# Allegro board CN0536 Allegro File.brd
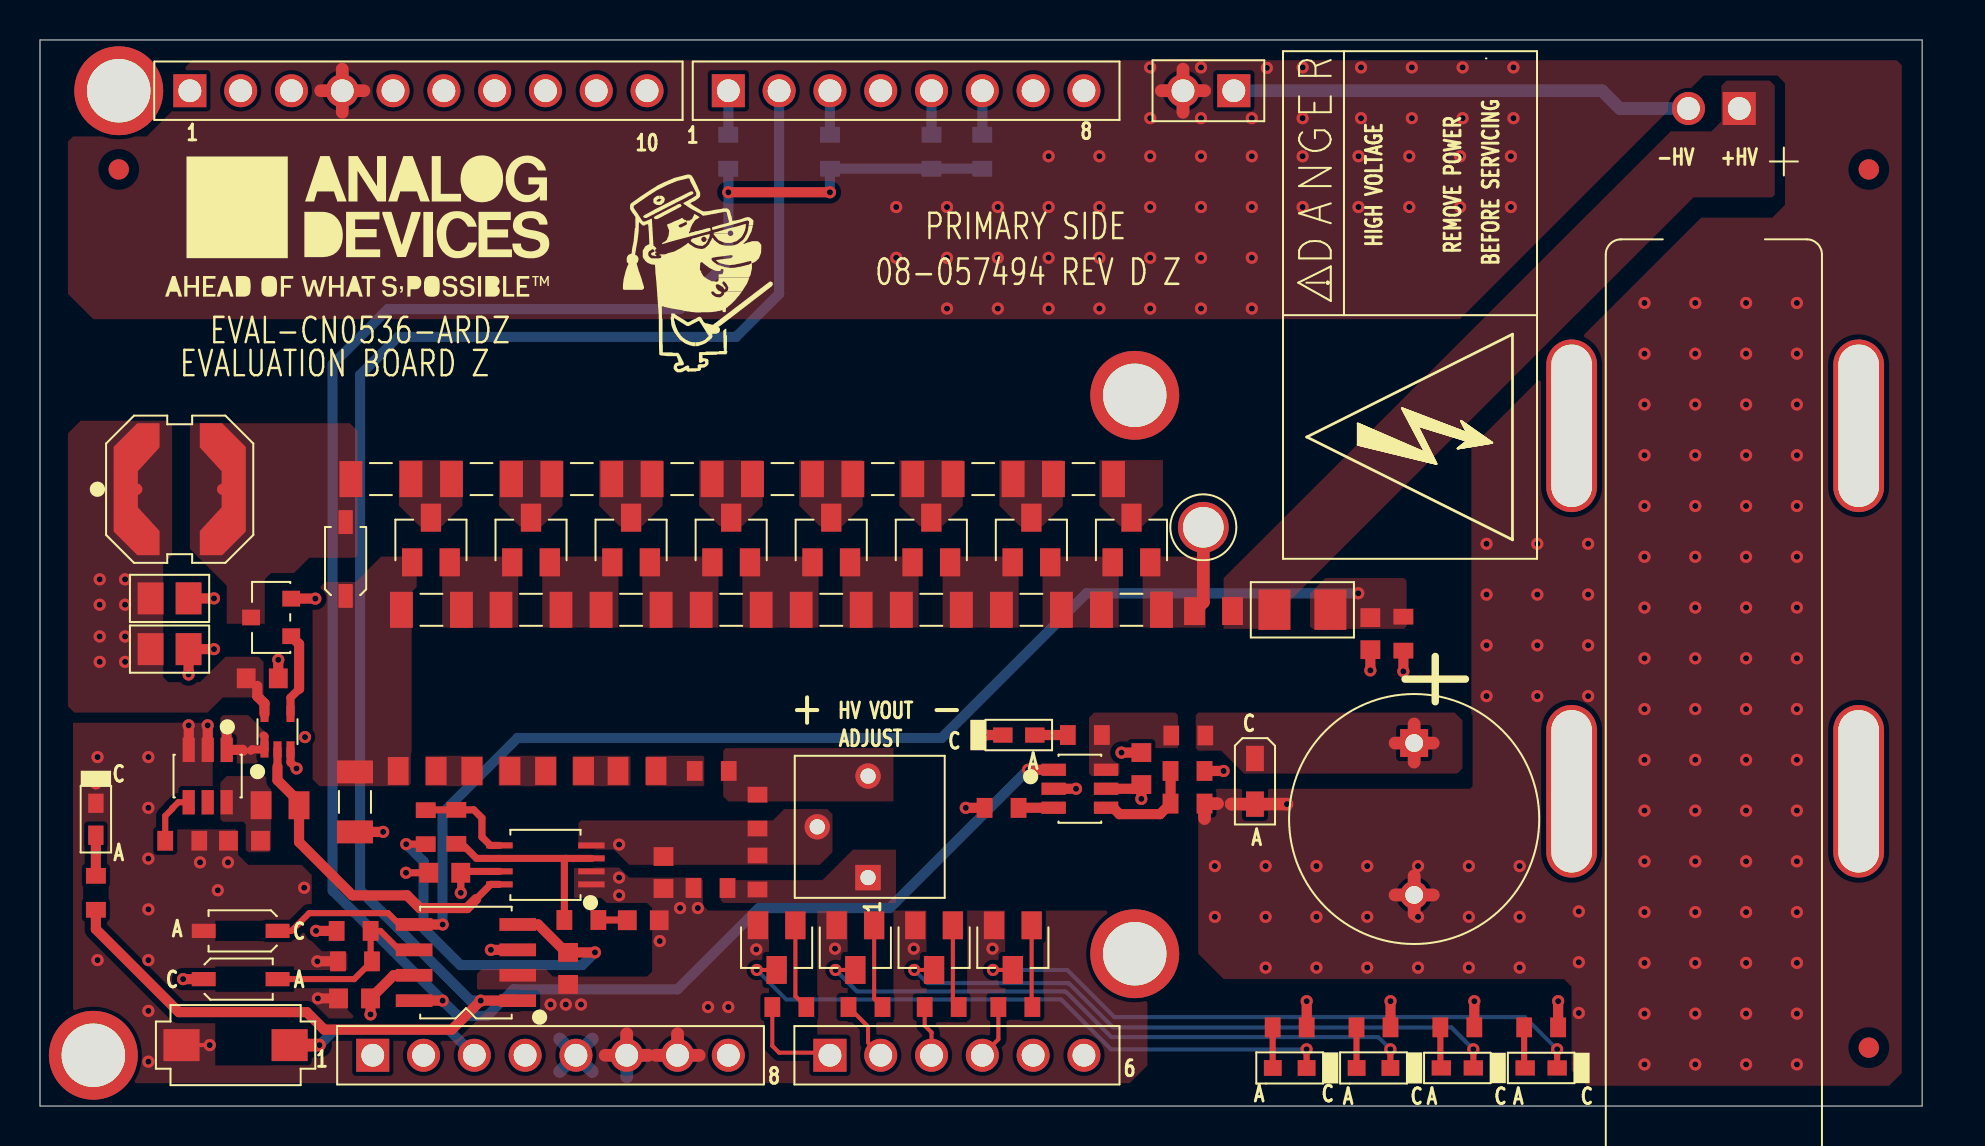
[diagram p0: board, top side]
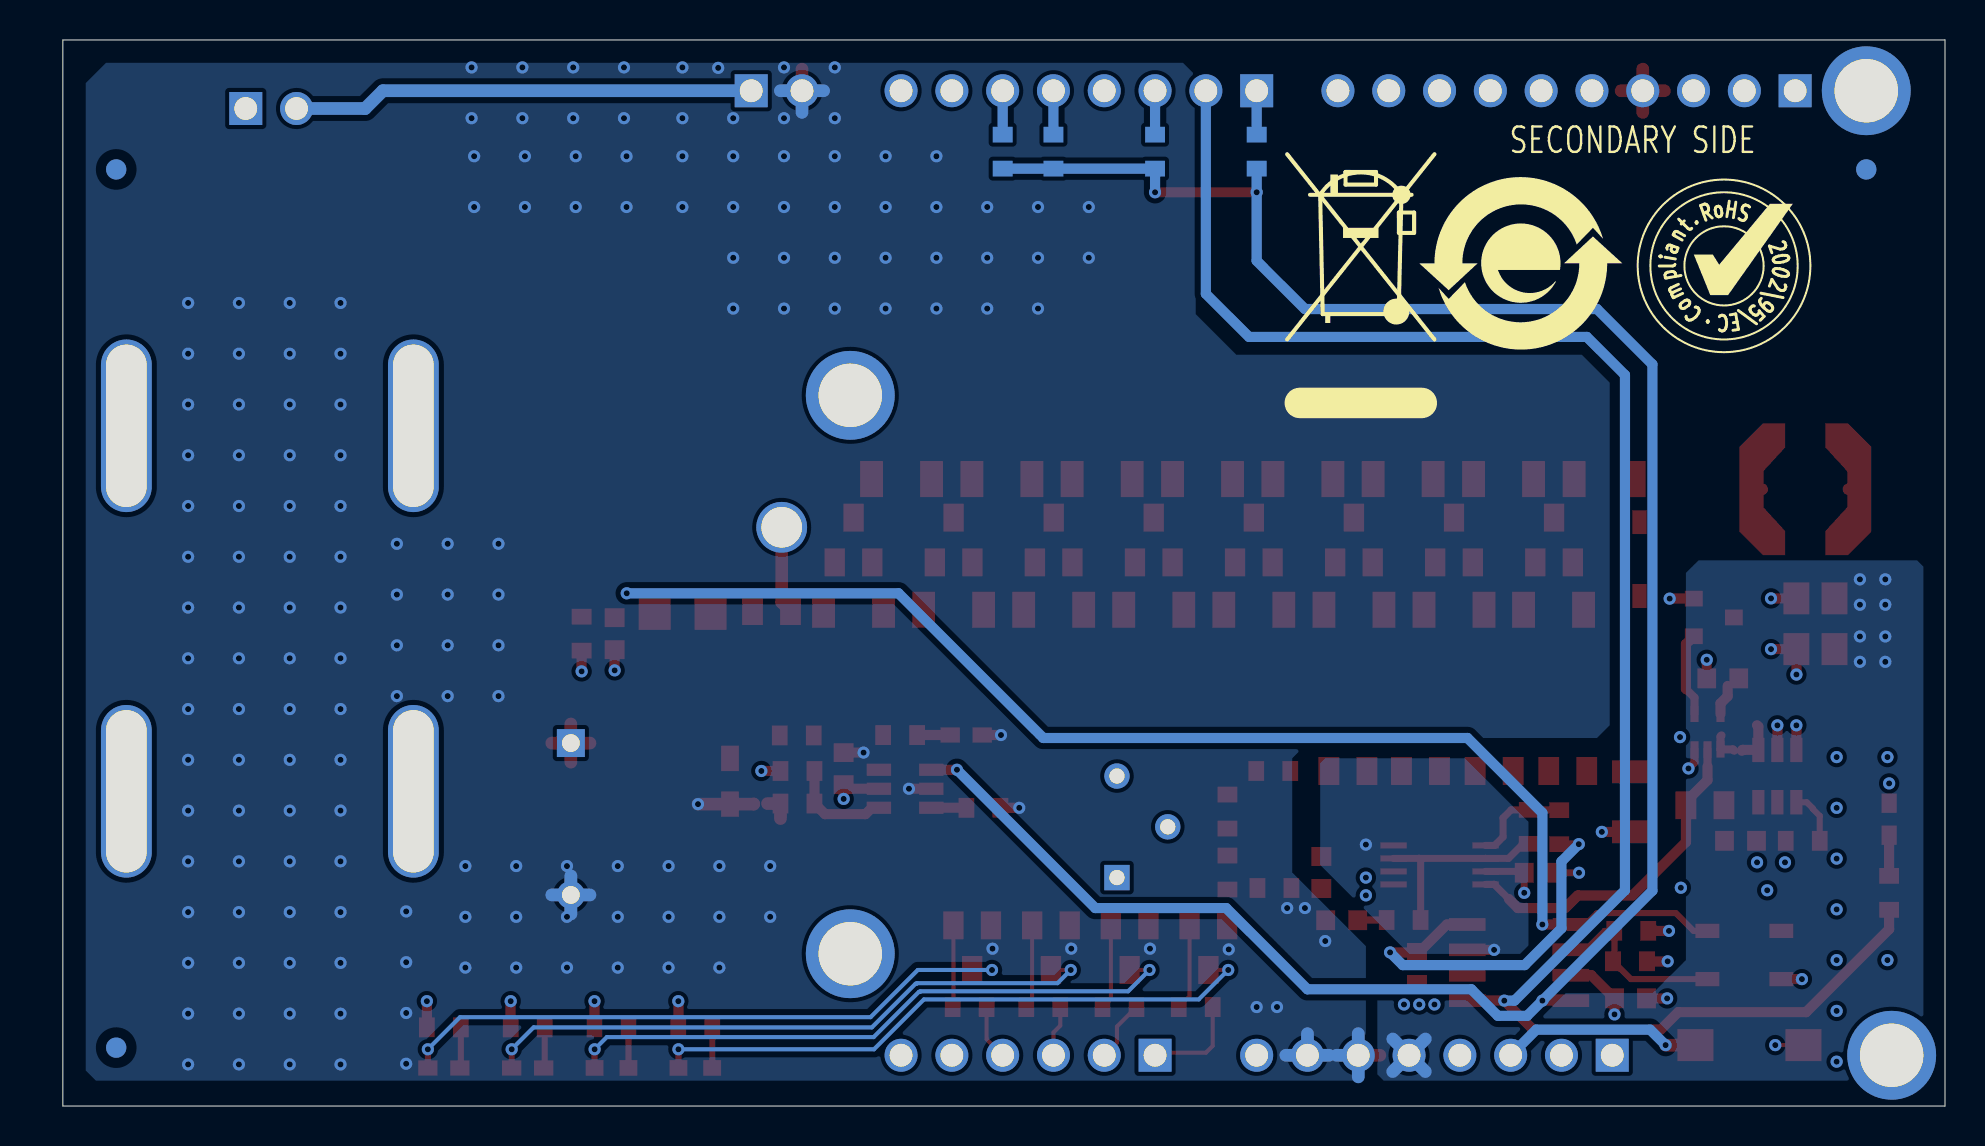
[diagram p1: board, bottom side, seen from below]

Outline 94.11 x 53.34 mm; copper layers: TOP, L2_GND, L3_VCC, BOTTOM. Coordinates in mm from the lower left corner of the outline.
Outline path: 0,53.34 0,0 94.11,0 94.11,53.34 0,53.34

## Design rules (mm)
constraint set DEFAULT: min track width 0.203

## Placement (name value [footprint] x y rotation side)
C1  1uF  [C0603]  10.22 13.27 180 top
C2  10uF  [C0805H53]  6.48 22.86 0 top
C3  10uF  [C0805H53]  6.48 25.4 0 top
C4  1uF  [C0603]  11.11 21.4 0 top
C5  0.1uF  [C1206]  15.75 15.22 270 top
C6  0.1uF  [C1206]  17.04 31.37 0 top
C7  0.1uF  [C1206]  19.57 24.83 0 top
C8  0.1uF  [C1206]  22.07 31.37 0 top
C9  47pF  [C0603]  31.18 11.68 90 top
C10  0.1uF  [C1206]  24.55 24.83 0 top
C11  0.1uF  [C1206]  27.09 31.37 0 top
C12  0.1uF  [C1206]  29.55 24.83 0 top
C13  47pF  [C0603]  26.4 6.89 270 top
C14  0.1uF  [C1206]  32.11 31.37 0 top
C15  0.1uF  [C1206]  34.56 24.83 0 top
C16  0.1uF  [C1206]  37.12 31.37 0 top
C17  0.1uF  [C1206]  39.56 24.83 0 top
C18  1uF  [C0603]  30.16 9.3 0 top
C19  0.1uF  [C1206]  42.14 31.37 0 top
C20  1uF  [C0603]  20.24 11.67 180 top
C21  0.1uF  [C1206]  44.57 24.83 0 top
C22  1uF  [C0603]  15.73 5.39 180 top
C23  0.1uF  [C1206]  47.16 31.37 0 top
C24  0.1uF  [C1206]  49.57 24.83 0 top
C25  0.1uF  [C1206]  52.17 31.37 0 top
C26  10pF  [C1206H37]  63.12 24.83 180 top
C27  0.1uF  [C1206]  54.57 24.83 0 top
C28  250pF  [C0603]  66.52 23.63 270 top
C29  1uF  [C0603]  55.07 16.88 90 top
D1  BAV21W-7-F  [SOD123-3]  15.28 27.37 90 top
D2  BAV23S  [SOT23]  19.55 28.32 0 top
D3  BAV23S  [SOT23]  24.55 28.32 0 top
D4  BAV23S  [SOT23]  29.55 28.32 0 top
D5  BAV23S  [SOT23]  34.56 28.32 0 top
D6  BAV23S  [SOT23]  39.56 28.32 0 top
D7  BAV23S  [SOT23]  44.57 28.32 0 top
D8  BAV23S  [SOT23]  49.57 28.32 0 top
D9  BAV23S  [SOT23]  54.57 28.32 0 top
D10  BAS16HT1G  [SOD323]  60.75 16.25 270 top
D11  BAV21W-7-F  [SOD123-3]  10.03 6.35 0 top
D12  BAV21W-7-F  [SOD123-3]  10.03 8.76 180 top
DS1  TLMS1000GS08  [LED0603]  48.94 18.56 0 top
DS2  19-217/S2C-AL1M2VY/3T  [LED0603_A]  62.48 1.91 180 top
DS3  19-217/S2C-AL1M2VY/3T  [LED0603_A]  66.67 1.91 180 top
DS4  TLMS1000GS08  [LED0603]  70.87 1.91 180 top
DS5  TLMS1000GS08  [LED0603]  75.06 1.91 180 top
DS6  TLMS1000GS08  [LED0603]  2.79 14.35 270 top
JP1  0  [R0603]  39.5 47.75 270 bottom
JP2  0  [R0603]  34.42 47.75 270 bottom
JP3  0  [R0603]  44.58 47.75 270 bottom
JP4  0  [R0603]  47.12 47.75 270 bottom
L1  47uH  [LSMSQ236H138]  6.98 30.86 0 top
M1  AI-1223-TWT-5V-5-R  [TORAD299D472H382]  68.71 18.16 270 top
M2  SI-29BG  [MSI-29BG]  84.96 49.91 270 top
NOREF  -  []  -22.71 -2.15 0 top
NOREF#2  -  []  -90.8 -138.3 0 top
NOREF#3  -  []  218.31 74.8 0 top
NOREF#4  -  []  2.67 2.54 0 top
NOREF#5  -  []  86.65 56.15 0 top
NOREF#6  -  [unnamed#2]  3.94 50.8 0 top
NOREF#7  -  []  -90.8 -138.3 0 top
NOREF#8  -  [unnamed#3]  90.93 34.04 90 top
NOREF#9  -  []  10.21 2.54 0 top
NOREF#10  -  [unnamed#3]  76.58 34.04 90 top
NOREF#11  -  [unnamed#4]  91.44 46.86 0 top
NOREF#12  -  []  66.8 -32.26 0 top
NOREF#13  -  []  94.11 0 0 top
NOREF#14  -  []  -90.8 -138.3 0 top
NOREF#15  -  []  -90.8 -138.3 0 top
NOREF#16  -  []  -48.13 2.86 0 top
NOREF#17  -  []  17.02 43.81 0 top
NOREF#18  -  [unnamed#4]  3.94 46.86 0 top
NOREF#19  -  []  26.8 243.84 0 top
NOREF#20  -  [unnamed#2]  54.74 35.56 0 top
NOREF#21  -  []  221.59 85.09 0 top
NOREF#22  -  [unnamed#3]  76.58 15.75 90 top
NOREF#23  -  []  0 0 0 top
NOREF#24  -  []  -86.11 -38.73 0 top
NOREF#25  -  [unnamed#3]  90.93 15.75 90 top
NOREF#26  -  []  259.71 331.53 0 top
NOREF#27  -  [unnamed#4]  91.44 2.92 0 top
NOREF#28  -  []  94.11 0 90 top
NOREF#29  -  []  2.67 2.54 0 top
NOREF#30  -  []  0 53.34 0 top
NOREF#31  -  []  0 0 0 top
NOREF#32  -  [unnamed#2]  54.74 7.62 0 top
NOREF#33  -  []  32.89 41.66 0 top
NOREF#34  -  [unnamed#2]  2.67 2.54 0 top
NOREF#35  -  []  -52.7 188.09 0 top
NOREF#36  -  []  0 53.34 0 top
NOREF#37  -  []  21.21 42.16 180 bottom
NOREF#38  -  []  19.94 51.31 180 bottom
NOREF#39  -  []  11.05 42.04 180 bottom
NOREF#40  -  [unnamed#4]  91.44 2.92 180 bottom
NOREF#41  -  [unnamed#4]  91.44 46.86 180 bottom
NOREF#42  -  [unnamed#4]  3.94 46.86 180 bottom
P1  SSQ-108-03-G-S  [CNSAMTECSSQ-108-XX-X-S]  16.64 2.54 0 top
P2  SSQ-106-03-G-S  [CNSAMTECSSQ-106-XX-X-S]  39.5 2.54 0 top
P3  SSQ-110-03-G-S  [CNSAMTECSSQ-110-XX-X-S]  7.49 50.8 0 top
P4  SSQ-108-03-G-S  [CNSAMTECSSQ-108-XX-X-S]  34.42 50.8 0 top
P5  TSW-102-08-G-S  [CNSAMTEC1X2H330LD36]  58.42 50.8 180 top
Q1  MMBT3904LT3G  [SOT23]  40.77 7.92 180 top
Q2  DMN10H220L-7  [SOT23-M3]  11.56 24.45 90 top
Q3  MMBT3904LT3G  [SOT23]  36.83 7.92 180 top
Q4  MMBT3904LT3G  [SOT23]  44.7 7.92 180 top
Q5  MMBT3904LT3G  [SOT23]  48.64 7.92 180 top
R1  287K  [R0603]  7.11 13.27 0 top
R2  221  [R0805]  12 15.05 0 top
R3  30MEG  [R0805]  18.86 16.76 180 top
R4  30MEG  [R0805]  22.55 16.76 180 top
R5  30MEG  [R0805]  26.23 16.76 180 top
R6  127K  [R0603]  48.08 14.92 180 top
R7  3MEG  [R0603]  33.59 16.76 0 top
R8  2.7MEG  [R0603]  33.53 10.91 0 top
R9  2MEG  [POTBOURNS3262P]  41.4 11.43 90 top
R10  1MEG  [R0603]  35.88 14.73 90 top
R11  1MEG  [R0603]  35.88 11.68 90 top
R12  127K  [R0603]  20.82 13.97 90 top
R13  453K  [R0603]  19.29 13.95 270 top
R14  453K  [R0603]  57.38 15.13 0 top
R15  127K  [R0603]  57.38 16.76 180 top
R16  1K  [R0603]  27.07 9.31 0 top
R17  330  [R0603]  2.79 10.67 90 top
R18  100  [R0603]  57.41 18.54 0 top
R19  30MEG  [R0805]  58.67 24.77 180 top
R20  30MEG  [R0805]  29.85 16.76 180 top
R21  24.9K  [R0603]  68.17 23.63 270 top
R22  330  [R0603]  52.24 18.56 180 top
R23  330  [R0603]  62.48 3.94 180 top
R24  330  [R0603]  66.67 3.94 180 top
R25  330  [R0603]  70.87 3.94 180 top
R26  330  [R0603]  75.06 3.94 180 top
R27  3MEG  [R0603]  15.68 8.76 0 top
R28  2MEG  [R0603]  15.75 7.24 180 top
R29  3.3K  [R0603]  37.47 4.95 0 top
R30  3.3K  [R0603]  41.27 4.95 0 top
R31  3.3K  [R0603]  45.09 4.95 0 top
R32  3.3K  [R0603]  48.77 4.95 0 top
S1  SKQMBBE010  [SWSML236W138H197]  9.78 3.05 180 top
TP1  TESTPAD  [TPC100D80]  58.17 28.96 0 top
U1  SN74LVC1G08DCKR  [SC70-5]  11.87 18.73 0 top
U2  LTC1540IMS8#PBF  [MSOP8]  25.27 12.07 90 top
U3  LTC6906IS6#PBF  [TSOT23_6]  8.38 16.51 180 top
U4  LTC6994CS6-1#TRMPBF  [TSOT23_6]  51.99 15.88 270 top
U5  LTC1441CS8#PBF  [SO8NB-5]  21.3 7.18 90 top

## Library data of the parts
C1 C4 C18 C20 C22 C29 = CAP: User Part Number: UPN; Tolerance: 10; alternate symbols: (); part number: CAP_SM-1UF,16V,10,E020111,C0603; tolerance: 10
C2 C3 = CAP: Tolerance: 10; User Part Number: UPN; alternate symbols: (); part number: CAP_SM-10UF,16V,10,E006166,C0805H53; tolerance: 10
C5-C8 C10-C12 C14-C17 C19 C21 C23-C25 C27 = CAP: User Part Number: UPN; Tolerance: 5; alternate symbols: (); part number: CAP_SM-0.1UF,100V,5,E019934,C1206; tolerance: 5
C9 C13 = CAP: User Part Number: UPN; Tolerance: 10; alternate symbols: (); part number: CAP_SM-47PF,50V,10,E040135,C0603; tolerance: 10
C26 = CAP: Tolerance: 5; User Part Number: UPN; alternate symbols: (); part number: CAP_SM-10PF,630V,5,E041857,C1206H37; tolerance: 5
C28 = CAP: User Part Number: UPN; Tolerance: 5; alternate symbols: (); part number: CAP_SM-250PF,25V,5,E040628,C0603; tolerance: 5
D1 D11 D12 = DIO: Tolerance: N/A; User Part Number: UPN; alternate symbols: (); part number: DIO_SM-BAV21W-7-F,200V,N/A,E015087,SOD123-3; tolerance: N/A
D2-D9 = DIO3P_V3: User Part Number: UPN; Tolerance: N/A; alternate symbols: (); part number: DIO3P_V3_SM-BAV23S,250V,N/A,E034937,SOT23; tolerance: N/A
D10 = DIO: Tolerance: N/A; User Part Number: UPN; alternate symbols: (); part number: DIO_SM-BAS16HT1G,100V,N/A,E001129,SOD323; tolerance: N/A
DS1 DS4-DS6 = DIOLED: Tolerance: N/A; User Part Number: UPN; alternate symbols: (); part number: DIOLED_SM-TLMS1000GS08,N/A,N/A,E018253,LED0603; tolerance: N/A
DS2 DS3 = DIOLED: User Part Number: UPN; Tolerance: N/A; alternate symbols: (); part number: DIOLED_SM-19-217/S2C-AL1M2VY/3T,5V,N/A,E026542,LED0603_A; tolerance: N/A
JP1-JP4 = RESJMPRSHRT: User Part Number: UPN; Tolerance: JUMPER; alternate symbols: (); part number: RESJMPRSHRT_SM-0,E004447,1/10W,JUMPER,R0603; tolerance: JUMPER
L1 = IND: User Part Number: UPN; Tolerance: 20; alternate symbols: (); part number: IND_SM-47UH,20,E018439,LSMSQ236H138; tolerance: 20
M1 = ICAI_1223: User Part Number: UPN; Tolerance: N/A; alternate symbols: (); part number: ICAI_1223_TH-AI-1223-TWT-5V-5-R,E030982,TORAD299D472H382; tolerance: N/A
M2 = MOD_SI_29BG: User Part Number: UPN; Tolerance: N/A; alternate symbols: (); part number: MOD_SI_29BG_TH-SI-29BG,E039719,MSI-29BG; tolerance: N/A
P1 P4 = CN8P_A: User Part Number: UPN; Tolerance: N/A; alternate symbols: (); part number: CN8P_A_TH-SSQ-108-03-G-S,E020478,CNSAMTECSSQ-108-XX-X-S; tolerance: N/A
P2 = CN6P: User Part Number: UPN; Tolerance: N/A; alternate symbols: (); part number: CN6P_TH-SSQ-106-03-G-S,E020477,CNSAMTECSSQ-106-XX-X-S; tolerance: N/A
P3 = CN10P: User Part Number: UPN; Tolerance: N/A; alternate symbols: (); part number: CN10P_TH-SSQ-110-03-G-S,E020479,CNSAMTECSSQ-110-XX-X-S; tolerance: N/A
P5 = CN2P: User Part Number: UPN; Tolerance: N/A; alternate symbols: (); part number: CN2P_TH-TSW-102-08-G-S,E006296,CNSAMTEC1X2H330LD36; tolerance: N/A
Q1 Q3-Q5 = TRANNPN_V2: User Part Number: UPN; Tolerance: N/A; alternate symbols: (); part number: TRANNPN_V2_SM-MMBT3904LT3G,E025627,SOT23; tolerance: N/A
Q2 = TRANNMOSFET_V8: User Part Number: UPN; Tolerance: N/A; alternate symbols: (); part number: TRANNMOSFET_V8_SM-DMN10H220L-7,E042109,SOT23-M3; tolerance: N/A
R1 = RES: User Part Number: UPN; Tolerance: 1; alternate symbols: (R0603L); part number: RES_SM-287K,E026586,1/10W,1,R0603; tolerance: 1
R2 = RES: User Part Number: UPN; Tolerance: 0.1; alternate symbols: (R0805L); part number: RES_SM-221,E004167,1/10W,0.1,R0805; tolerance: 0.1
R3-R5 R19 R20 = RES: User Part Number: UPN; Tolerance: 1; alternate symbols: (); part number: RES_SM-30MEG,E034828,1/5W,1,R0805; tolerance: 1
R6 R12 R15 = RES: User Part Number: UPN; Tolerance: 1; alternate symbols: (R0603L); part number: RES_SM-127K,E025582,1/16W,1,R0603; tolerance: 1
R7 R27 = RES: User Part Number: UPN; Tolerance: 1; alternate symbols: (R0603L); part number: RES_SM-3MEG,E011856,1/10W,1,R0603; tolerance: 1
R8 = RES: User Part Number: UPN; Tolerance: 5; alternate symbols: (); part number: RES_SM-2.7MEG,E043637,1/10W,5,R0603; tolerance: 5
R9 = RESVAR: Tolerance: 10; User Part Number: UPN; alternate symbols: (); part number: RESVAR_TH-2MEG,E038798,1/2W,10,POTBOURNS3262P; tolerance: 10
R10 R11 = RES: User Part Number: UPN; Tolerance: 1; alternate symbols: (R0603L); part number: RES_SM-1MEG,E003682,1/10W,1,R0603; tolerance: 1
R13 R14 = RES: User Part Number: UPN; Tolerance: 1; alternate symbols: (); part number: RES_SM-453K,E032192,1/10W,1,R0603; tolerance: 1
R16 = RES: User Part Number: UPN; Tolerance: 1; alternate symbols: (R0603L); part number: RES_SM-1K,E029591,1/10W,1,R0603; tolerance: 1
R17 R22-R26 = RES: User Part Number: UPN; Tolerance: 5; alternate symbols: (R0603L); part number: RES_SM-330,E003857,1/10W,5,R0603; tolerance: 5
R18 = RES: User Part Number: UPN; Tolerance: 1; alternate symbols: (R0603L); part number: RES_SM-100,E003668,1/10W,1,R0603; tolerance: 1
R21 = RES: User Part Number: UPN; Tolerance: 1; alternate symbols: (R0603L); part number: RES_SM-24.9K,E025629,1/10W,1,R0603; tolerance: 1
R28 = RES: User Part Number: UPN; Tolerance: 1; alternate symbols: (R0603L); part number: RES_SM-2MEG,E021609,1/10W,1,R0603; tolerance: 1
R29-R32 = RES: User Part Number: UPN; Tolerance: 5; alternate symbols: (R0603L); part number: RES_SM-3.3K,E036086,1/4W,5,R0603; tolerance: 5
S1 = SWSPST2PIN_V3: Tolerance: N/A; User Part Number: UPN; alternate symbols: (); part number: SWSPST2PIN_V3_SM-SKQMBBE010,E026439,SWSML236W138H197; tolerance: N/A
TP1 = NCTESTPAD: Tolerance: N/A; User Part Number: UPN; alternate symbols: (); part number: NCTESTPAD_TH-TESTPAD,E019699,TPC100D80; tolerance: N/A
U1 = 741G08: Tolerance: N/A; User Part Number: UPN; alternate symbols: (); part number: 741G08_SM-SN74LVC1G08DCKR,E019772,SC70-5; tolerance: N/A
U2 = ADLTC1540: Tolerance: N/A; User Part Number: UPN; alternate symbols: (); part number: ADLTC1540_SM-LTC1540IMS8#PBF,E043510,MSOP8; tolerance: N/A
U3 = ADLTC6906: User Part Number: UPN; Tolerance: N/A; alternate symbols: (); part number: ADLTC6906_SM-LTC6906IS6#PBF,E038452,TSOT23_6; tolerance: N/A
U4 = ADLTC6994: User Part Number: UPN; Tolerance: N/A; alternate symbols: (); part number: ADLTC6994_SM-LTC6994CS6-1#TRMPBF,E038792,TSOT23_6; tolerance: N/A
U5 = ADLTC1441: Tolerance: N/A; User Part Number: UPN; alternate symbols: (); part number: ADLTC1441_SM-LTC1441CS8#PBF,E038786,SO8NB-5; tolerance: N/A

## Footprints (pads in the part's own frame, mm; a bottom-side part is the same pattern mirrored in y, then rotated)
C0603
  rect 0.94x0.991 smd: 1(-0.8,0) 2(0.8,0)
C0805H53
  rect 1.295x1.6 smd: 1(-0.953,0) 2(0.953,0)
C1206
  rect 1.143x1.803 smd: 1(-1.5,0) 2(1.5,0)
C1206H37
  rect 1.6x2.007 smd: 1(-1.397,0) 2(1.397,0)
CNSAMTEC1X2H330LD36
  rect 1.651x1.651 hole 1.143: 1(-1.27,0)
  round 1.651 hole 1.143: 2(1.27,0)
CNSAMTECSSQ-106-XX-X-S
  rect 1.651x1.651 hole 1.143: 1(0,0)
  round 1.651 hole 1.143: 2(2.54,0) 3(5.08,0) 4(7.62,0) 5(10.16,0) 6(12.7,0)
CNSAMTECSSQ-108-XX-X-S
  rect 1.651x1.651 hole 1.143: 1(0,0)
  round 1.651 hole 1.143: 2(2.54,0) 3(5.08,0) 4(7.62,0) 5(10.16,0) 6(12.7,0) 7(15.24,0) 8(17.78,0)
CNSAMTECSSQ-110-XX-X-S
  rect 1.651x1.651 hole 1.143: 1(0,0)
  round 1.651 hole 1.143: 2(2.54,0) 3(5.08,0) 4(7.62,0) 5(10.16,0) 6(12.7,0) 7(15.24,0) 8(17.78,0) 9(20.32,0) 10(22.86,0)
LED0603
  rect 0.965x0.762 smd: A(0.8,0) C(-0.8,0)
LED0603_A
  rect 0.889x0.787 smd: A(0.845,0) C(-0.845,0)
LSMSQ236H138
  custom 2.299x6.604 smd: 1(-2.151,0) 2(2.151,0)
MSI-29BG
  rect 1.651x1.651 hole 1.143: 1(0,0)
  round 1.651 hole 1.143: 2(0,-2.54)
MSOP8
  rect 0.305x1.321 smd: 1(-0.975,-2.3) 2(-0.325,-2.3) 3(0.325,-2.3) 4(0.975,-2.3) 5(0.975,2.3) 6(0.325,2.3) 7(-0.325,2.3) 8(-0.975,2.3)
POTBOURNS3262P
  rect 1.27x1.27 hole 0.762: 1(0,0)
  round 1.27 hole 0.762: 2(2.54,2.54) 3(5.08,0)
R0603
  rect 0.787x0.991 smd: 1(-0.85,0) 2(0.85,0)
R0805
  rect 1.041x1.397 smd: 1(-0.95,0) 2(0.95,0)
SC70-5
  rect 0.406x0.813 smd: 1(-0.65,-0.89) 2(0,-0.89) 3(0.65,-0.89) 4(0.65,0.89) 5(-0.65,0.89)
SO8NB-5
  rect 0.635x1.829 smd: 1(-1.905,-2.591) 2(-0.635,-2.591) 3(0.635,-2.591) 4(1.905,-2.591) 5(1.905,2.591) 6(0.635,2.591) 7(-0.635,2.591) 8(-1.905,2.591)
SOD123-3
  rect 1.194x0.711 smd: A(1.847,0) C(-1.847,0)
SOD323
  rect 1.27x0.889 smd: A(1.143,0) C(-1.143,0)
SOT23
  rect 1.016x1.397 smd: 1(-0.94,-1.118) 2(0.94,-1.118) 3(0,1.118)
SOT23-M3
  rect 0.787x0.889 smd: 1(-0.94,-1.003) 2(0.94,-1.003) 3(0,1.003)
SWSML236W138H197
  rect 1.803x1.6 smd: 1(-2.702,0) 2(2.702,0)
TORAD299D472H382
  round 1.397 hole 0.889: N(7.6,0)
  rect 1.397x1.397 hole 0.889: P(0,0)
TPC100D80
  round 2.54 hole 2.032: 1(0,0)
TSOT23_6
  rect 0.61x1.219 smd: 1(-0.95,-1.31) 2(0,-1.31) 3(0.95,-1.31) 4(0.95,1.31) 5(0,1.31) 6(-0.95,1.31)
unnamed#2
  round 4.445 hole 3.175 unplated: (0,0)
unnamed#3
  oval 8.636x2.54 hole 8.128x2.032 unplated: (0,0)
unnamed#4
  round 1.016 smd: (0,0)

## Nets
DGND: C1.2(N2) C2.2(N2) C3.2(N2) C4.2(N2) C5.2(N2) C9.1 C13.2(N2) C18.2(N2) C20.2(N2) C22.2(N2) C29.2(N2) D10.A(P) D12.A(P) DS1.C DS6.C M1.N(N2) P1.6 P1.7 P3.4 P5.2(N2) Q1.2(E) Q2.2(S) Q3.2(E) Q4.2(E) Q5.2(E) R1.2(N2) R6.2(N2) R8.1 R14.2(N2) R28.2(N2) S1.2(B) U1.3 U2.1 U2.2(V-) U3.2 U3.3 U4.2 U5.2(V-)
BOOSTENABLE: R2.2(N2) U1.2 U2.8
DETECT_OUTPUT: JP1.2(S2) JP2.2(S2) JP3.2(S2) JP4.2(S2) U4.1 U5.8
GEIGER_DETECTB: C26.1 C28.1 D12.C R21.1 U5.5
HIGHV_PG: P4.2 R17.1 U5.1
IO_VREF: C22.1 C28.2(N2) C29.1 D11.C P1.2 R15.1 R21.2(N2) R23.1 R24.1 R25.1 R26.1 R27.1 U4.5(V+) U5.7
LEVEL1: P2.1 R29.1
LEVEL2: P2.2 R30.1
LEVEL3: P2.3 R31.1
LEVEL4: P2.4 R32.1
POT_METER: C9.2(N2) R9.2 R10.1 R11.2(N2) U2.4 U5.3
SYS_5V: C2.1 C3.1 C4.1 C20.1 L1.1 P1.5 U1.5 U2.7
UNNAMED_2_741G08_I88_A: U1.1 U3.1
UNNAMED_2_741G08_I88_Y: Q2.1 U1.4(Y)
UNNAMED_2_ADLTC1441_I204__1: D11.A(P) R27.2(N2) R28.1 U5.6
UNNAMED_2_ADLTC1441_I206_: C13.1 R13.2(N2) U5.4
UNNAMED_2_ADLTC1540_I30_HYST: R12.2(N2) R13.1 U2.5
UNNAMED_2_ADLTC1540_I30_IN: R12.1 R16.1 U2.3 U2.6
UNNAMED_2_ADLTC6906_I29_SET: R1.1 U3.4
UNNAMED_2_ADLTC6906_I29_V: C1.1 R2.1 U3.6(V+)
UNNAMED_2_ADLTC6994_I247_DIV: R14.1 R15.2(N2) U4.4
UNNAMED_2_ADLTC6994_I247_OUT: R18.1 R22.1 U4.6
UNNAMED_2_ADLTC6994_I247_SET: R6.1 U4.3
UNNAMED_2_CAP_I32_N1: C5.1 C7.1 D1.C D2.1(P) R3.2(N2)
UNNAMED_2_CAP_I34_N1: C6.1 D1.A(P) L1.2(N2) Q2.3
UNNAMED_2_CAP_I34_N2: C6.2(N2) C8.1 D2.3
UNNAMED_2_CAP_I36_N2: C8.2(N2) C11.1 D3.3
UNNAMED_2_CAP_I37_N2: C11.2(N2) C14.1 D4.3
UNNAMED_2_CAP_I39_N2: C14.2(N2) C16.1 D5.3
UNNAMED_2_CAP_I41_N2: C16.2(N2) C19.1 D6.3
UNNAMED_2_CAP_I43_N2: C19.2(N2) C23.1 D7.3
UNNAMED_2_CAP_I45_N2: C23.2(N2) C25.1 D8.3
UNNAMED_2_CAP_I47_N2: C25.2(N2) D9.3
UNNAMED_2_CAP_I49_N2: C7.2(N2) C10.1 D2.2 D3.1(P)
UNNAMED_2_CAP_I50_N2: C10.2(N2) C12.1 D3.2 D4.1(P)
UNNAMED_2_CAP_I58_N1: C12.2(N2) C15.1 D4.2 D5.1(P)
UNNAMED_2_CAP_I58_N2: C15.2(N2) C17.1 D5.2 D6.1(P)
UNNAMED_2_CAP_I59_N2: C17.2(N2) C21.1 D6.2 D7.1(P)
UNNAMED_2_CAP_I60_N2: C21.2(N2) C24.1 D7.2 D8.1(P)
UNNAMED_2_CAP_I61_N2: C24.2(N2) C27.1 D8.2 D9.1(P)
UNNAMED_2_CAP_I62_N2: C27.2(N2) D9.2 R19.2(N2) TP1.1(N1)
UNNAMED_2_CAP_I108_N1: C18.1 R16.2(N2)
UNNAMED_2_CAP_I267_N2: C26.2(N2) M2.1 R19.1
UNNAMED_2_CN2P_I277_N1: M2.2(N2) P5.1
UNNAMED_2_DIO_I241_N: D10.C M1.P R18.2(N2)
UNNAMED_2_DIOLED_I248_P: DS1.A(P) R22.2(N2)
UNNAMED_2_RES_I65_N2: R3.1 R4.2(N2)
UNNAMED_2_RES_I66_N2: R4.1 R5.2(N2)
UNNAMED_2_RES_I127_N2: R8.2(N2) R9.1 R11.1
UNNAMED_2_RES_I128_N2: R7.2(N2) R9.3(N3) R10.2(N2)
UNNAMED_2_RES_I263_N1: R7.1 R20.1
UNNAMED_2_RES_I263_N2: R5.1 R20.2(N2)
UNNAMED_3_CN8PA_I14_N3: P1.3 S1.1
UNNAMED_3_CN8PA_I15_N1: JP2.1 P4.1
UNNAMED_3_CN8PA_I15_N3: JP1.1 P4.3
UNNAMED_3_CN8PA_I15_N5: JP3.1 P4.5
UNNAMED_3_CN8PA_I15_N6: JP4.1 P4.6
UNNAMED_3_DIOLED_I101_N: DS2.C Q3.3
UNNAMED_3_DIOLED_I101_P: DS2.A(P) R23.2(N2)
UNNAMED_3_DIOLED_I112_N: DS4.C Q4.3
UNNAMED_3_DIOLED_I112_P: DS4.A(P) R25.2(N2)
UNNAMED_3_DIOLED_I122_N: DS5.C Q5.3
UNNAMED_3_DIOLED_I122_P: DS5.A(P) R26.2(N2)
UNNAMED_3_DIOLED_I126_N: DS3.C Q1.3
UNNAMED_3_DIOLED_I126_P: DS3.A(P) R24.2(N2)
UNNAMED_3_DIOLED_I154_P: DS6.A(P) R17.2(N2)
UNNAMED_3_RES_I128_N2: Q3.1 R29.2(N2)
UNNAMED_3_RES_I129_N2: Q4.1 R31.2(N2)
UNNAMED_3_RES_I130_N2: Q5.1 R32.2(N2)
UNNAMED_3_RES_I131_N2: Q1.1 R30.2(N2)

Pads without a net: P1 1 4 8; P2 5 6; P3 1 2 3 5 6 7 8 9 10; P4 4 7 8; U3 5

## Via types
v1: diameter 0.61, hole 0.305, TOP to BOTTOM, 241 vias

## Routing (per net, layer and track width the routed paths; a pad name or vN(x,y) marks a point on that pad's centre or on a via; arc(x,y) is an arc through that point)
DGND: length 85.9
  TOP w0.203: S1.2 v1(8.49,3.05)
  TOP w0.356: C20.2 v1(18.3,11.67)
  TOP w0.406: v1(12.83,16.89) 12.52,17.19 U1.3
  TOP w0.508: C5.2 v1(17.16,13.72) ; v1(8.7,22.86) C2.2 v1(7.43,21.59) ; C29.2 v1(54.07,17.68) ; U4.2 v1(51.8,15.88) ; C3.2 v1(8.7,25.4) ; U3.3 v1(7.43,19.05) ; C4.2 v1(11.91,22.33) ; R6.2 v1(46.29,14.92) ; DS1.C v1(47.2,18.56) ; R28.2 v1(13.87,7.24) ; C22.2 v1(13.89,5.39) ; Q2.2 v1(13.77,25.39) ; U3.2 v1(8.38,19.05)
  TOP w0.635: 14.03,50.8 P3.4 ; P3.4 15.11,51.88 ; P3.4 15.11,49.72 ; P3.4 16.19,50.8 ; 59.56,15.11 59.57,15.11 D10.A v1(62.35,15.11) ; 28.26,2.54 P1.6 ; P1.6 29.34,3.62 ; P1.6 30.42,2.54 ; 68.71,9.61 M1.N ; M1.N 67.75,10.56 ; M1.N 68.71,11.51 ; M1.N 69.66,10.56 ; P5.2 57.15,51.88 ; P5.2 57.15,49.72 ; P5.2 58.23,50.8 ; P5.2 56.07,50.8 ; P1.7 31.88,3.62 ; P1.7 30.8,2.54 ; P1.7 32.96,2.54 ; 58.23,14.38 R14.2 58.87,15.13
  L2_GND w0.635: P5.2 57.15,51.88 ; P5.2 56.07,50.8 ; P5.2 57.15,49.72 ; P5.2 58.23,50.8 ; M1.N 68.71,11.51 ; M1.N 69.66,10.56 ; M1.N 68.71,9.61 ; M1.N 67.75,10.56 ; P1.6 29.34,3.62 ; P1.6 28.26,2.54 ; P1.6 29.34,1.46 ; P1.6 30.42,2.54 ; P3.4 15.11,51.88 ; P3.4 16.19,50.8 ; P3.4 14.03,50.8 ; P3.4 15.11,49.72 ; 30.8,2.54 P1.7 ; P1.7 32.96,2.54 ; P1.7 31.88,3.62 ; P1.7 31.88,1.46
  L3_VCC w0.635: P3.4 15.11,51.88 ; P3.4 16.19,50.8 ; P3.4 14.03,50.8 ; P3.4 15.11,49.72 ; 57.15,49.72 P5.2 ; P5.2 57.15,51.88 ; P5.2 56.07,50.8 ; P5.2 58.23,50.8
  BOTTOM w0.635: P5.2 58.23,50.8 ; P5.2 57.15,49.72 ; P5.2 56.07,50.8 ; P1.6 29.34,3.62 ; P1.6 30.42,2.54 ; P1.6 29.34,1.46 ; 67.75,10.56 M1.N ; M1.N 69.66,10.56 ; M1.N 68.71,11.51 ; M1.N 68.71,9.61 ; P1.7 31.88,3.62 ; P1.7 30.8,2.54 ; P1.7 32.96,2.54
  vias: v1(2.79,16.14) v1(2.88,17.46) v1(2.88,7.3) v1(5.42,17.46) v1(5.42,14.92) v1(5.42,12.38) v1(5.42,9.84) v1(5.42,7.3) v1(5.42,4.76) v1(5.42,2.22) v1(8,12.19) v1(8.89,10.8) v1(9.4,12.19) v1(13.21,10.92) v1(13.25,18.46) v1(25.53,5.08) v1(26.29,5.08) v1(27.05,5.08) v1(28.96,11.43) v1(28.96,10.54) v1(30.99,8.25) v1(32,9.91) v1(32.89,9.91) v1(33.4,4.95) v1(34.42,4.95) v1(35.81,7.84) v1(39.75,7.87) v1(42.81,44.98) v1(42.81,42.44) v1(43.69,7.87) v1(45.35,44.98) v1(45.35,42.44) v1(45.35,39.9) v1(47.62,7.87) v1(47.89,44.98) v1(47.89,42.44) v1(47.89,39.9) v1(50.43,47.52) v1(50.43,44.98) v1(50.43,42.44) v1(50.43,39.9) v1(52.97,47.52) v1(52.97,44.98) v1(52.97,42.44) v1(52.97,39.9) v1(55.51,51.97) v1(55.51,49.43) v1(55.51,47.52) v1(55.51,44.98) v1(55.51,42.44) v1(55.51,39.9) v1(58.05,51.97) v1(58.05,49.43) v1(58.05,47.52) v1(58.05,44.98) v1(58.05,42.44) v1(58.05,39.9) v1(58.74,12.01) v1(58.74,9.47) v1(60.59,49.43) v1(60.59,47.52) v1(60.59,44.98) v1(60.59,42.44) v1(60.59,39.9) v1(61.28,12.01) v1(61.28,9.47) v1(61.28,6.93) v1(61.34,51.94) v1(63.13,51.97) v1(63.13,49.43) v1(63.13,47.52) v1(63.13,44.98) v1(63.82,12.01) v1(63.82,9.47) v1(63.82,6.93) v1(65.92,47.52) v1(65.92,44.98) v1(66.05,51.97) v1(66.05,49.43) v1(66.36,12.01) v1(66.36,9.47) v1(66.36,6.93) v1(68.46,47.52) v1(68.46,44.98) v1(68.59,51.97) v1(68.59,49.43) v1(68.9,12.01) v1(68.9,9.47) v1(68.9,6.93) v1(71,47.52) v1(71,44.98) v1(71.13,51.97) v1(71.13,49.43) v1(71.44,12.01) v1(71.44,9.47) v1(71.44,6.93) v1(72.33,28.13) v1(72.33,25.59) v1(72.33,23.05) v1(72.33,20.51) v1(73.54,47.52) v1(73.54,44.98) v1(73.67,51.97) v1(73.67,49.43) v1(73.98,12.01) v1(73.98,9.47) v1(73.98,6.93) v1(74.87,28.13) v1(74.87,25.59) v1(74.87,23.05) v1(74.87,20.51) v1(76.94,9.74) v1(76.94,7.2) v1(76.94,4.66) v1(76.94,2.12) v1(77.41,28.13) v1(77.41,25.59) v1(77.41,23.05) v1(77.41,20.51) v1(80.22,40.18) v1(80.22,37.64) v1(80.22,35.1) v1(80.22,32.56) v1(80.22,30.02) v1(80.22,27.48) v1(80.22,24.94) v1(80.22,22.4) v1(80.22,19.86) v1(80.22,17.32) v1(80.22,14.78) v1(80.22,12.24) v1(80.22,9.7) v1(80.22,7.16) v1(80.22,4.62) v1(80.22,2.08) v1(82.76,40.18) v1(82.76,37.64) v1(82.76,35.1) v1(82.76,32.56) v1(82.76,30.02) v1(82.76,27.48) v1(82.76,24.94) v1(82.76,22.4) v1(82.76,19.86) v1(82.76,17.32) v1(82.76,14.78) v1(82.76,12.24) v1(82.76,9.7) v1(82.76,7.16) v1(82.76,4.62) v1(82.76,2.08) v1(85.3,40.18) v1(85.3,37.64) v1(85.3,35.1) v1(85.3,32.56) v1(85.3,30.02) v1(85.3,27.48) v1(85.3,24.94) v1(85.3,22.4) v1(85.3,19.86) v1(85.3,17.32) v1(85.3,14.78) v1(85.3,12.24) v1(85.3,9.7) v1(85.3,7.16) v1(85.3,4.62) v1(85.3,2.08) v1(87.84,40.18) v1(87.84,37.64) v1(87.84,35.1) v1(87.84,32.56) v1(87.84,30.02) v1(87.84,27.48) v1(87.84,24.94) v1(87.84,22.4) v1(87.84,19.86) v1(87.84,17.32) v1(87.84,14.78) v1(87.84,12.24) v1(87.84,9.7) v1(87.84,7.16) v1(87.84,4.62) v1(87.84,2.08)
BOOSTENABLE: length 17
  TOP w0.356: U2.8 22.54,11.09 21.8,10.35
  TOP w0.406: 11.87,16.98 U1.2
  TOP w0.508: 11.87,16.98 11.87,16.3 12.95,15.23 R2.2 12.95,13.21 15.62,10.54 18.35,10.54 18.99,9.91 21.36,9.91 21.8,10.35
DETECT_OUTPUT: length 111.9
  TOP w0.508: v1(49.4,16.82) U4.1 ; U5.8 v1(20.13,5.27) ; v1(34.42,45.72) v1(39.5,45.72)
  BOTTOM w0.508: JP4.2 JP3.2 JP1.2 v1(39.5,45.72) ; v1(49.4,16.82) 42.48,9.91 35.94,9.91 31.88,5.84 23.68,5.84 22.35,4.51 20.89,4.51 v1(20.13,5.27) 14.63,10.78 14.63,37.11 17.4,39.88 32,39.88 34.42,42.29 v1(34.42,45.72) JP2.2
GEIGER_DETECTB: length 64.8
  TOP w0.305: D12.C 12.57,8.76 13.46,9.65 17.4,9.65 17.97,9.08 U5.5
  TOP w0.508: v1(20.13,9.08) U5.5
  BOTTOM w0.508: v1(20.13,9.08) 20.13,14.67 23.88,18.41 45.09,18.41 52.32,25.65 v1(65.91,25.65)
HIGHV_PG: length 91.6
  TOP w0.508: 2.79,9.82 2.79,8.85 6.94,4.7 13.33,4.7 14.21,3.82 20.59,3.82 v1(22.04,5.27) U5.1
  BOTTOM w0.508: P4.2 36.96,40.64 34.8,38.48 17.91,38.48 16,36.58 16,10.8 21.52,5.27 v1(22.04,5.27)
IO_VREF: length 20.7
  TOP w0.508: v1(16.53,4.58) C22.1 17.68,6.54 U5.7 ; R21.2 v1(68.17,21.75) ; C28.2 v1(66.52,21.8) ; R23.1 v1(63.33,5.25) ; U4.5 54.86,15.88 C29.1 v1(55.07,15.37) ; R27.1 v1(13.8,8.76) ; D11.C v1(7.16,6.35) ; R24.1 v1(67.52,5.25) ; R26.1 v1(75.91,5.25) ; R25.1 v1(71.72,5.25) ; R15.1 v1(59.18,16.76)
  L3_VCC w0.635: P1.2 20.26,2.54 ; P1.2 19.18,1.46 ; P1.2 19.18,3.62 ; P1.2 18.1,2.54
LEVEL1: length 5
  TOP w0.203: P2.1 39.37,2.67 36.96,2.67 36.62,3.01 R29.1
LEVEL2: length 3.1
  TOP w0.203: R30.1 41.4,3.98 41.4,3.17 P2.2
LEVEL3: length 2.6
  TOP w0.203: P2.3 44.58,3.68 44.24,4.02 R31.1
LEVEL4: length 2.7
  TOP w0.203: P2.4 47.92,3.34 R32.1
POT_METER: length 1.3
  TOP w0.508: U5.3 v1(22.55,7.81)
  vias: v1(28.96,13.08)
SYS_5V: length 19.6
  TOP w0.356: U2.7 21.11,11.74 C20.1 v1(21.04,10.67)
  TOP w0.508: U1.5 11.22,20.14 10.87,20.5 10.87,21.02
  L3_VCC w0.635: v1(21.04,10.67) 24.64,7.07 24.64,4.7 P1.5
  BOTTOM w0.635: 25.98,1.73 P1.5 ; P1.5 27.61,1.73 ; P1.5 27.61,3.35 ; P1.5 25.98,3.35
  vias: v1(2.98,26.35) v1(2.98,25.08) v1(2.98,23.49) v1(2.98,22.22) v1(4.25,26.35) v1(4.25,25.08) v1(4.25,23.49) v1(4.25,22.22)
UNNAMED_2_741G08_I88_A: length 3.5
  TOP w0.406: 10.54,17.78 10.6,17.84 U1.1 11.22,18.49 11.18,18.54
  TOP w0.508: 9.4,19.05 9.33,18.98 U3.1 10.12,17.82 10.16,17.78
UNNAMED_2_741G08_I88_Y: length 4.2
  TOP w0.406: U1.4 12.52,20.44 12.95,20.86
  TOP w0.508: Q2.1 12.95,23.11 12.95,20.86
UNNAMED_2_ADLTC1441_I204__1: length 9.2
  TOP w0.305: U5.6 17.97,7.81 17.02,8.76 R27.2 16.53,7.31 R28.1 15.71,6.35 D11.A
UNNAMED_2_ADLTC1441_I206_: length 19.6
  TOP w0.356: R13.2 v1(18.31,13.1)
  TOP w0.508: v1(27.75,7.69) C13.1 26.3,7.69 24.91,9.08 U5.4
  BOTTOM w0.508: v1(18.31,13.1) 19.18,12.24 19.18,8.89 21.02,7.05 27.11,7.05 v1(27.75,7.69)
UNNAMED_2_ADLTC1540_I30_HYST: length 5
  TOP w0.356: U2.5 22.52,13.04 22.1,13.46 22.1,14.41 21.69,14.82 R12.2 19.3,14.82 R13.1
UNNAMED_2_ADLTC1540_I30_IN: length 10.2
  TOP w0.356: 26.29,12.39 U2.6 21.82,12.39 21.1,13.12 R12.1 ; 26.29,12.39 26.22,12.32 R16.1 ; 26.29,12.39 U2.3
UNNAMED_2_ADLTC6906_I29_SET: length 2.7
  TOP w0.305: R1.1 6.26,14.52 6.61,14.87 6.61,14.9 6.92,15.2 U3.4
UNNAMED_2_ADLTC6994_I247_DIV: length 5.2
  TOP w0.508: R15.2 R14.1 56,14.61 53.98,14.61 53.66,14.93 U4.4
UNNAMED_2_ADLTC6994_I247_SET: length 1.8
  TOP w0.508: U4.3 48.93,14.93 R6.1
UNNAMED_2_CAP_I62_N2: length 4.4
  TOP w0.635: R19.2 58.17,25.21 TP1.1
UNNAMED_2_CAP_I108_N1: length 1.5
  TOP w0.356: C18.1 29.35,9.31 R16.2
UNNAMED_2_CN2P_I277_N1: length 23.1
  BOTTOM w0.635: M2.2 78.99,49.91 78.11,50.8 P5.1
UNNAMED_2_DIO_I241_N: length 3.8
  TOP w0.635: 67.75,18.16 M1.P ; M1.P 68.71,17.21 ; M1.P 68.71,19.11 ; M1.P 69.66,18.16
UNNAMED_2_DIOLED_I248_P: length 1.7
  TOP w0.508: R22.2 DS1.A
UNNAMED_3_CN8PA_I14_N3: length 10.1
  TOP w0.635: S1.1 v1(13.97,3.05)
  BOTTOM w0.508: P1.3 20.43,3.82 14.74,3.82 v1(13.97,3.05)
UNNAMED_3_CN8PA_I15_N1: length 2.2
  BOTTOM w0.508: JP2.1 P4.1
UNNAMED_3_CN8PA_I15_N3: length 2.2
  BOTTOM w0.508: JP1.1 P4.3
UNNAMED_3_CN8PA_I15_N5: length 2.2
  BOTTOM w0.508: JP3.1 P4.5
UNNAMED_3_CN8PA_I15_N6: length 2.2
  BOTTOM w0.508: JP4.1 P4.6
UNNAMED_3_DIOLED_I101_N: length 31.1
  TOP w0.203: Q3.3 v1(35.84,6.81)
  TOP w0.305: DS2.C v1(63.33,2.84)
  BOTTOM w0.203: v1(35.84,6.81) 37.31,5.33 51.05,5.33 53.55,2.84 v1(63.33,2.84)
UNNAMED_3_DIOLED_I101_P: length 2
  TOP w0.305: R23.2 61.63,1.91 61.64,1.91
UNNAMED_3_DIOLED_I112_N: length 31.5
  TOP w0.203: Q4.3 v1(43.71,6.81)
  TOP w0.305: v1(71.67,2.84) DS4.C
  BOTTOM w0.203: v1(71.67,2.84) 70.57,3.94 53.65,3.94 51.47,6.12 51.42,6.12 51.39,6.15 44.37,6.15 v1(43.71,6.81)
UNNAMED_3_DIOLED_I112_P: length 2.1
  TOP w0.305: R25.2 70.02,1.95 70.07,1.91
UNNAMED_3_DIOLED_I122_N: length 31.8
  TOP w0.203: Q5.3 v1(47.65,6.81)
  TOP w0.305: DS5.C v1(75.86,2.84)
  BOTTOM w0.203: v1(75.86,2.84) 74.25,4.45 53.72,4.45 51.36,6.81 v1(47.65,6.81)
UNNAMED_3_DIOLED_I122_P: length 2.1
  TOP w0.305: 74.26,1.91 74.21,1.95 R26.2
UNNAMED_3_DIOLED_I126_N: length 31.3
  TOP w0.203: Q1.3 v1(39.78,6.81)
  TOP w0.305: DS3.C v1(67.52,2.84)
  BOTTOM w0.203: v1(67.52,2.84) 66.91,3.45 53.57,3.45 51.3,5.71 51.25,5.71 51.22,5.74 40.84,5.74 v1(39.78,6.81)
UNNAMED_3_DIOLED_I126_P: length 2
  TOP w0.305: R24.2 65.83,1.91 65.83,1.91
UNNAMED_3_DIOLED_I154_P: length 2
  TOP w0.508: R17.2 DS6.A
UNNAMED_3_RES_I128_N2: length 4.3
  TOP w0.203: Q3.1 37.77,5.5 R29.2
UNNAMED_3_RES_I129_N2: length 4.2
  TOP w0.203: Q4.1 45.64,5.24 R31.2
UNNAMED_3_RES_I130_N2: length 4.1
  TOP w0.203: R32.2 49.58,4.99 Q5.1
UNNAMED_3_RES_I131_N2: length 4.3
  TOP w0.203: R30.2 41.71,5.37 Q1.1

## Copper pours and planes (outline as drawn; the poured copper is in the pictures)
DGND on TOP: 1.65,19.18 8.51,19.18 8.64,19.05 8.64,14.73 6.6,14.73 6.6,13.84 9.78,13.84 9.91,13.72 9.91,12.57 10.41,12.07 13.08,12.07 13.59,11.56 13.59,8.25 14.1,7.75 15.24,7.75 15.37,7.62 15.37,4.83 15.75,4.45 21.46,4.45 21.84,4.83 21.84,6.6 22.1,6.86 25.27,6.86 25.65,6.48 30.35,6.48 30.61,6.73 30.61,9.91 30.35,10.16 28.32,10.16 28.07,10.41 26.42,10.41 26.29,10.54 26.29,11.81 26.42,11.94 28.96,11.94 29.46,11.43 33.02,11.43 33.15,11.3 33.15,10.03 33.4,9.78 36.45,9.78 36.45,2.79 38.86,2.79 38.86,9.78 40.39,9.78 40.39,4.19 42.67,4.19 42.67,9.78 44.32,9.78 44.32,4.19 46.36,4.19 46.36,9.78 48.26,9.78 48.26,4.32 50.16,4.32 50.16,9.78 54.61,9.78 55.37,9.02 55.37,2.03 54.48,1.14 2.54,1.14 1.65,2.03 ; 4 cut-outs
DGND on TOP: 92.84,52.32 93.09,52.07 93.09,1.65 92.46,1.02 77.34,1.02 76.58,1.78 76.58,5.97 76.2,6.35 59.18,6.35 57.91,7.62 57.91,15.49 58.29,15.88 71.5,15.88 71.63,16 71.63,19.56 71.56,19.62 71.56,32.96 83.06,44.45 86.61,44.45 87.25,45.09 87.25,51.18 86.87,51.56 83.19,51.56 70.99,39.37 2.67,39.37 1.4,40.64 1.4,48.26 1.65,48.51 5.33,48.51 6.73,49.91 6.73,51.44 7.62,52.32
DGND on BOTTOM: 37.47,39.62 35.43,37.59 18.16,37.59 16.76,36.2 16.76,19.05 17.4,18.41 31.62,18.41 32.64,17.4 32.64,11.68 28.96,8 28.96,1.65 29.34,1.27 92.46,1.27 92.96,1.78 92.96,51.18 91.95,52.2 38.1,52.2 37.47,51.56
DGND on L2_GND: 1.02,52.32 93.09,52.32 93.09,1.02 1.02,1.02
DGND on L3_VCC: 1.02,52.32 93.09,52.32 93.09,1.02 79.5,1.02 79.5,41.53 79.48,41.63 79.43,41.71 77.9,43.23 77.82,43.29 77.72,43.31 62.1,43.31 62.01,43.29 61.92,43.23 61.03,42.34 60.98,42.26 60.96,42.16 60.96,20.7 33.02,20.7 32.84,20.63 32.77,20.45 32.77,17.27 16.76,17.27 16.67,17.25 16.58,17.2 6.42,7.04 6.37,6.96 6.35,6.86 6.35,1.02 1.02,1.02
GEIGER_DETECTB on TOP: 63.5,25.65 63.5,24 63.63,23.88 68.2,23.88 68.33,24 68.33,26.29 68.2,26.42 64.26,26.42
IO_VREF on L3_VCC: 62.21,42.8 77.62,42.8 78.99,41.42 78.99,1.02 6.86,1.02 6.86,6.75 16.87,16.76 33.02,16.76 33.2,16.84 33.27,17.02 33.27,20.19 61.21,20.19 61.39,20.27 61.47,20.45 61.47,42.06
POT_METER on TOP: 39.37,14.86 37.21,14.86 36.64,14.29 27.05,14.29 26.92,14.16 26.92,12.83 28.7,12.83 29.46,12.07 38.99,12.07 39.62,12.7 39.62,14.61
POT_METER on BOTTOM: 26.67,7.49 31.24,12.07 31.24,17.14 30.99,17.4 24,17.4 20.83,14.22 20.83,7.75 21.08,7.49
SYS_5V on TOP: 6.16,21.46 6.41,21.21 8,21.21 9.27,22.48 10.92,22.48 11.18,22.22 11.18,20.45 9.14,20.45 8.38,19.68 1.71,19.68 1.4,20 1.4,33.66 2.03,34.29 6.35,34.29 6.6,34.04 6.6,27.56 6.16,27.11
SYS_5V on BOTTOM: 28.38,5.33 28.38,1.59 28.07,1.27 2.35,1.27 1.08,2.54 1.08,26.99 1.4,27.3 12.32,27.3 12.95,26.67 12.95,7.3 14.61,5.65 28.07,5.65
UNNAMED_2_741G08_I88_A on TOP: 9.02,19.43 9.02,17.27 9.14,17.14 11.3,17.14 11.43,17.27 11.43,18.54 10.41,19.56 9.14,19.56
UNNAMED_2_ADLTC6906_I29_V on TOP: 9.02,16.19 9.02,14.35 9.14,14.22 10.16,14.22 10.29,14.1 10.29,12.83 10.41,12.7 11.43,12.7 11.56,12.83 11.56,16.19 11.24,16.51 9.33,16.51
UNNAMED_2_ADLTC6994_I247_OUT on TOP: 53.85,16.51 52.58,16.51 52.45,16.64 52.45,19.43 52.7,19.68 56.77,19.68 56.9,19.56 56.9,17.91 54.23,17.91 53.98,17.65 53.98,16.64
UNNAMED_2_CAP_I32_N1 on TOP: 13.63,16.34 13.97,16 18.41,16 18.54,16.13 18.54,17.65 18.58,17.69 18.58,25.72 18.84,25.97 18.84,27.5 17.06,27.5 15.79,26.23 14.26,26.23 13.63,25.59
UNNAMED_2_CAP_I34_N1 on TOP: 9.33,24.13 9.33,26.04 7.49,27.88 7.49,34.04 7.62,34.16 15.49,34.16 15.88,33.78 15.88,27.56 15.75,27.43 13.46,27.43 12.7,26.67 11.56,26.67 11.24,26.35 11.24,24.13
UNNAMED_2_CAP_I34_N2 on TOP: 17.95,32.32 17.95,30.04 18.96,29.02 20.11,29.02 21.12,30.04 21.12,32.32
UNNAMED_2_CAP_I36_N2 on TOP: 22.95,32.32 22.95,30.04 23.97,29.02 25.11,29.02 26.13,30.04 26.13,32.32
UNNAMED_2_CAP_I37_N2 on TOP: 27.95,32.32 27.95,30.04 28.97,29.02 30.11,29.02 31.13,30.04 31.13,32.32
UNNAMED_2_CAP_I39_N2 on TOP: 32.96,32.32 32.96,30.04 33.97,29.02 35.12,29.02 36.13,30.04 36.13,32.32
UNNAMED_2_CAP_I41_N2 on TOP: 37.96,32.32 37.96,30.04 38.98,29.02 40.12,29.02 41.14,30.04 41.14,32.32
UNNAMED_2_CAP_I43_N2 on TOP: 42.97,32.32 42.97,30.04 43.98,29.02 45.12,29.02 46.14,30.04 46.14,32.32
UNNAMED_2_CAP_I45_N2 on TOP: 47.97,32.32 47.97,30.04 48.99,29.02 50.13,29.02 51.14,30.04 51.14,32.32
UNNAMED_2_CAP_I47_N2 on TOP: 52.97,32.32 52.97,30.04 53.99,29.02 55.13,29.02 56.15,30.04 56.15,32.32
UNNAMED_2_CAP_I49_N2 on TOP: 20.11,27.5 20.11,23.94 23.92,23.94 23.92,27.5
UNNAMED_2_CAP_I50_N2 on TOP: 25.11,27.5 25.11,23.94 28.92,23.94 28.92,27.5
UNNAMED_2_CAP_I58_N1 on TOP: 30.11,27.5 30.11,23.94 33.92,23.94 33.92,27.5
UNNAMED_2_CAP_I58_N2 on TOP: 35.12,27.5 35.12,23.94 38.93,23.94 38.93,27.5
UNNAMED_2_CAP_I59_N2 on TOP: 40.12,27.5 40.12,23.94 43.93,23.94 43.93,27.5
UNNAMED_2_CAP_I60_N2 on TOP: 45.12,27.5 45.12,23.94 48.93,23.94 48.93,27.5
UNNAMED_2_CAP_I61_N2 on TOP: 50.13,27.5 50.13,23.94 53.94,23.94 53.94,27.5
UNNAMED_2_CAP_I62_N2 on TOP: 55.13,27.5 55.13,23.94 58.29,23.94 58.29,27.37 58.17,27.5
UNNAMED_2_CAP_I267_N2 on TOP: 62.48,23.88 62.48,25.27 82.68,45.47 86.61,45.47 86.74,45.59 86.74,51.05 86.49,51.31 84.33,51.31 84.07,51.05 84.07,49.28 83.57,48.77 81.53,48.77 59.18,26.42 59.18,23.88
UNNAMED_2_DIO_I241_N on TOP: 60.2,16.64 70.87,16.64 71.12,16.89 71.12,19.3 70.74,19.68 57.91,19.68 57.79,19.56 57.79,17.91 57.91,17.78 59.05,17.78
UNNAMED_2_RES_I65_N2 on TOP: 19.24,17.47 19.24,16.06 19.3,16 22.1,16 22.16,16.07 22.16,17.46 22.1,17.53 19.3,17.53
UNNAMED_2_RES_I66_N2 on TOP: 22.93,17.47 22.93,16.06 22.99,16 25.78,16 25.85,16.07 25.85,17.46 25.78,17.53 22.99,17.53
UNNAMED_2_RES_I127_N2 on TOP: 42.8,10.16 34.16,10.16 34.04,10.29 34.04,11.3 39.12,11.3 40.64,12.83 42.8,12.83
UNNAMED_2_RES_I128_N2 on TOP: 42.67,17.91 34.29,17.91 34.16,17.78 34.16,15.49 34.42,15.24 42.67,15.24
UNNAMED_2_RES_I263_N1 on TOP: 30.29,17.47 30.29,16.06 30.35,16 33.15,16 33.21,16.07 33.21,17.46 33.15,17.53 30.35,17.53
UNNAMED_2_RES_I263_N2 on TOP: 26.61,17.47 26.61,16.06 26.67,16 29.46,16 29.53,16.07 29.53,17.46 29.46,17.53 26.67,17.53

## Text on the board
Ref Des/Silkscreen Bottom: SECONDARY SIDE
User.Comments: SEE DETAIL A | CUT THE EXCESS CABLE TIE. | HEADER AND GEIGER INSTALLATION | SOLDER THE 2 PINS OF M2 TO THE HEADER CONNECTOR. | DETAIL A | 1. MOUNT HEADER CONNECTOR ( TSW-102-09-G-S) FIRST AND SOLDER IT DOWN. | 2. LAYDOWN GEIGER (M2) ON THE PCB WITH PROPER POLARITY ORIENTATION THEN | 3. STRAP  THE COMPONENT M2 TO THE PCB SLOTTED HOLES USING CABLE TIE (M044354). | 5.    DO NOT TRIM/CUT EXCESS PINS OF P1, P2, P3 AND P4 | 6.    SEPARATE THE  BOARDS AFTER ASSEMBLY | 7.    INSTALL SHUNT CONNECTOR (M036050) TO PIN 1 AND 2 OF P5
Ref Des/Assembly Top: A | C
Ref Des/Silkscreen Top: C | A | ADJUST | HV VOUT | -HV | +HV | HIGH VOLTAGE | REMOVE POWER | BEFORE SERVICING | EVALUATION BOARD Z | EVAL-CN0536-ARDZ | PRIMARY SIDE | 08-057494 REV D Z
PAGE_OUTLINE: B | C | D | ECR-093893 | ECR-097939 | ECR-098625 | 18MAY20 | 22AUG20 | 12SEP20 | J.PENAFLOR | CUSTOMER EVAL BOARD Z
DIMENSION: " " | (REF) | DIA MAX
User.11: 1 | 2 | PCB BOARD | GEIGER MULLER (M2)
User.15: SECONDARY  SILKSCREEN
User.26: 08-      -07 | L2 GND
User.27: L3 VCC | 08-      -08
User.45: FIGURE | SIZE | 12.0 | 30.0 | 35.0 | 45.0 | 80.0 | 125.0 | 320.0x80.0 | PLATED | NON-PLATED | DRILL CHART: TOP to BOTTOM | ALL UNITS ARE IN MILS | QTY | 241 | 3 | 2 | 36 | 1 | 4 | TOLERANCE/NOTES
